# Altium PCB Carte_Traitement_V22.PcbDoc
Units mm, origin at the board's own origin, x right, y up, seen from the top; angles counter-clockwise.
Board outline 119.89 x 119.89 mm, 2 copper layers (Top Layer, Bottom Layer); 53 components, 102 nets, 357 pads, 31 vias.
Unrouted connection lines stored in the file: 97.
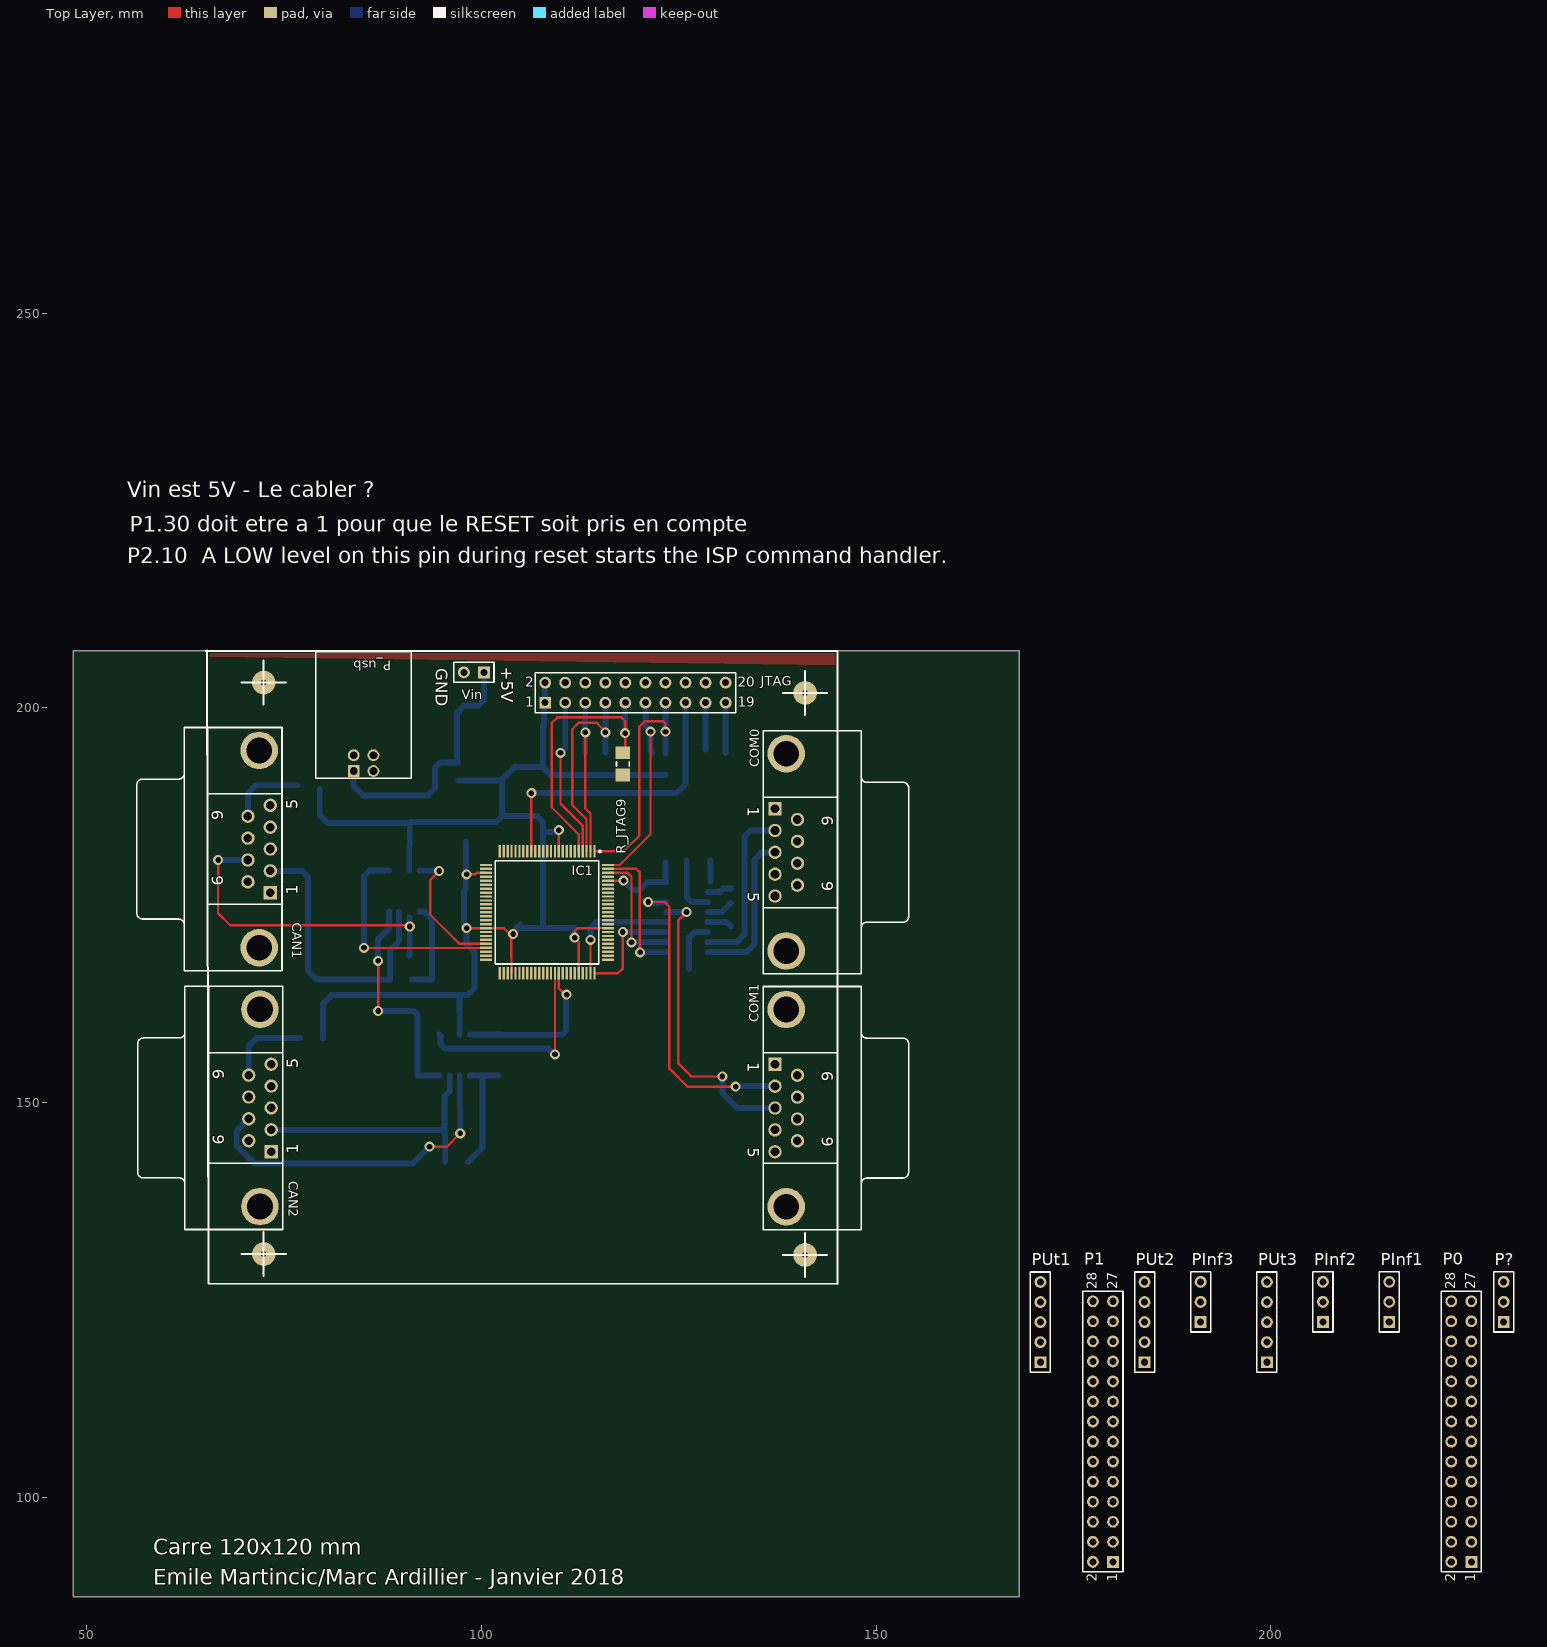
[diagram p0: Top Layer view]
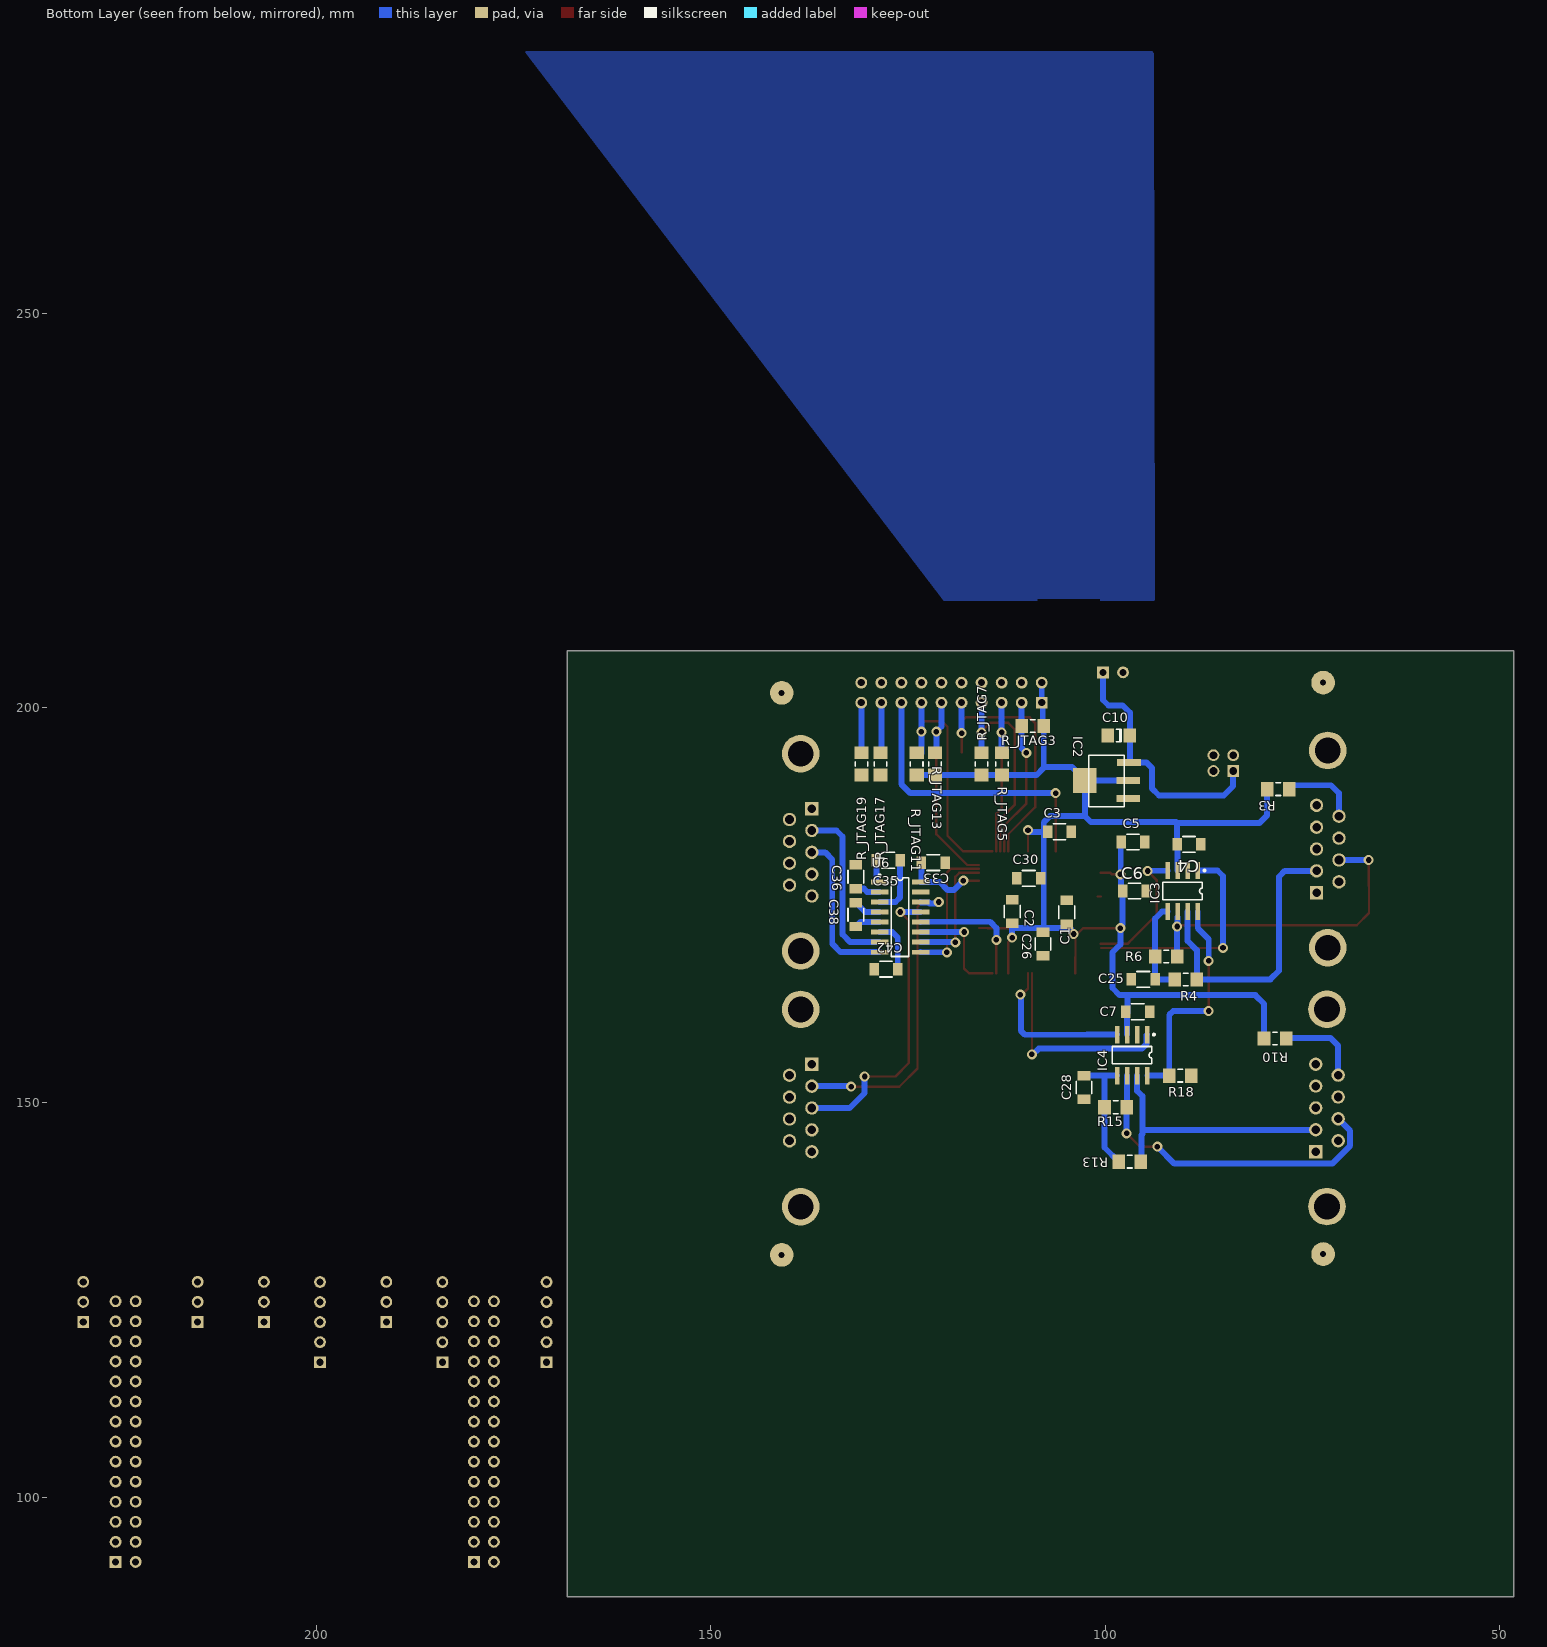
[diagram p1: Bottom Layer view, seen from below]

## Layer stack, top to bottom
Top Solder: solder mask 0.0102, Solder Resist, Dk 3.5
Top Layer: signal copper 0.0356
Dielectric1: dielectric 0.32, FR-4, Dk 4.8
Bottom Layer: signal copper 0.0356
Bottom Solder: solder mask 0.0102, Solder Resist, Dk 3.5

## Board outline
48.26,207.264 168.148,207.264 168.148,87.376 48.26,87.376

## Design rules (kind name [scope] priority, off if disabled: settings)
Clearance [All] p1: gap=0.3 ignorepadtopadclearanceinfootprint=FALSE except(0: Arc-Hole Track-Hole SMDPad-Hole THPad-Hole Via-Hole Fill-Hole Poly-Hole Region-Hole Text-Hole)
FabricationTestPointUsage TestPointUsage [All] p1: valid=0 allowmultiple=FALSE
FabricationTestpoint Testpoint [(IsPad And (OnTopLayer Or OnBottomLayer))] p1: side=3 testpointundercomponent=TRUE minsize=1.016 maxsize=2.54 preferedsize=1.524 minholesize=0 maxholesize=1.016 preferedholesize=0.813 testpointgrid=0.025 allowsidetop=TRUE allowsidebottom=TRUE usegrid=TRUE gridtolerance=0
PlaneClearance [All] p1: clearance=0.6
PlaneConnect [All] p1: planeconnectstyle=Relief reliefexpansion=0.508 reliefentries=4 reliefconductorwidth=0.762 reliefairgap=0.254
PolygonConnect [All] p1: connectstyle=Relief reliefconductorwidth=0.762 reliefentries=4 polygonreliefangle="90 Angle" airgapwidth=0.254
RoomDefinition Carte_Keil_Emile_proc_v0 [InComponentClass('Carte_Keil_Emile_proc_v0')] p1: confinementstyle=ConfineIn formatcopy=TRUE lockcomponents=FALSE outline 169.3,88.9 231.4,88.9 231.4,131.4 169.3,131.4
RoomDefinition Carte_Keil_Emile_can_v0 [InComponentClass('Carte_Keil_Emile_can_v0')] p2: confinementstyle=ConfineIn formatcopy=TRUE lockcomponents=FALSE outline 0,0 50.8,0 50.8,25.4 0,25.4
RoutingVias [All] p1: holewidth=0.8 width=1.3 viastyle="Through Hole" minholewidth=0.711 minwidth=1.27 maxholewidth=1.711 maxwidth=3.27
SolderMaskExpansion [All] p1: expansion=0.102 istentingtop=FALSE
Width [All] p1: maxlimit=2.5 minlimit=0.2 preferedwidth=0.75 toplayer_prefwidth=0.3 minimp=50.000000 maximp=50.000000 favimp=50.000000
26 further rules are at their usual default settings.

## Classes and differential pairs
component class Carte_Keil_Emile_proc_v0: C1 C2 C3 C4 C5 C6 C7 C10 IC1 IC2 JTAG P0 P1 P? P_usb PInf1 PInf2 PInf3 PUt1 PUt2 PUt3 R_JTAG3 R_JTAG5 R_JTAG7 R_JTAG9 R_JTAG11 R_JTAG13 R_JTAG17 R_JTAG19 Vin
component class Carte_Keil_Emile_can_v0: C25 C26 C28 C30 C33 C35 C36 C38 C42 CAN1 CAN2 COM0 COM1 IC3 IC4 R3 R4 R6 R10 R13 R15 R18 U6

## Components (designator, comment, footprint, x,y, rotation, side; value= is the part's Value field where it differs from the comment)
C1 "Capa_1206" Res_1206 104.9,174.1 r270 bottom
C2 "Capa_1206" Res_1206 111.8,174.2 r270 bottom
C3 "Capa_1206" Res_1206 105.8,184.3 r0 bottom
C4 "Capa_1206" Res_1206 89.4,182.7 r0 bottom
C5 "Capa_1206" Res_1206 96.5,183 r0 bottom
C6 "Capa_1206" Res_1206 96.3,176.8 r0 bottom
C7 "Capa_1206" Res_1206 95.9,161.5 r0 bottom
C10 "Capa_1206" CC3216-1206 98.3,196.5 r0 bottom
C25 "1n" Res_1206 95.2,165.6 r0 bottom
C26 "100n" Res_1206 107.9,170.1 r90 bottom
C28 "1n" Res_1206 102.7,151.9 r270 bottom
C30 "100n" Res_1206 109.7,178.4 r180 bottom
C33 "100n" Res_1206 121.8,180.4 r180 bottom
C35 "100n" Res_1206 127.5,180.7 r0 bottom
C36 "100n" Res_1206 131.6,178.6 r90 bottom
C38 "100n" Res_1206 131.6,173.8 r90 bottom
C42 "100n" Res_1206 127.8,166.9 r0 bottom
CAN1 "D Connector 9" DSUB1.385-2H9 62.32,182.115 r90 top
CAN2 "D Connector 9" DSUB1.385-2H9 62.42,149.315 r90 top
COM0 "D Connector 9" DSUB1.385-2H9 148.1,181.7 r270 top
COM1 "D Connector 9" DSUB1.385-2H9 148.1,149.3 r270 top
IC1 "LPC1768FBD" F-QFP14X14-G100/Z17N 108.3,174.1 r270 top
IC2 "LD1117" SOT-223 97.1,188.5 r0 bottom
IC3 "TJA1040" SO-G8 90.2,176.8 r0 bottom
IC4 "TJA1040" SO-G8 96.6,156 r0 bottom
JTAG "Header 10X2" HDR2X10 108.06,200.66 r0 top
P0 "Header 14X2" HDR2X14 225.4,91.8 r90 top
P1 "Header 14X2" HDR2X14 180,91.8 r90 top
P? "Header 3" HDR1X3 229.5,122.2 r90 top
P_usb "USB_Amphenol_61729-0010BLF" USB_B_Amphenol_61729-0010BLF 83.8,192 r180 top
PInf1 "Capt_Inf_G" HDR1X3 215,122.2 r90 top
PInf2 "Capt_Inf_Mid" HDR1X3 206.6,122.2 r90 top
PInf3 "Capt_Inf_Mid" HDR1X3 191.1,122.2 r90 top
PUt1 "Capt_Uts_G" HDR1X5 170.8,117.1 r90 top
PUt2 "Capt_Uts_Mid" HDR1X5 184,117.1 r90 top
PUt3 "Capt_Uts_D" HDR1X5 199.5,117.1 r90 top
R3 "Res" CR3216-1206 78.1,189.7 r0 bottom value=N.P.
R4 "Res" CR3216-1206 89.8,165.6 r0 bottom value=60
R6 "Res" CR3216-1206 92.3,168.5 r180 bottom value=60
R10 "Res" CR3216-1206 78.5,158.1 r0 bottom value=N.P.
R13 "Res" CR3216-1206 96.9,142.5 r0 bottom value=60
R15 "Res" CR3216-1206 98.7,149.4 r180 bottom value=60
R18 "Res" CR3216-1206 90.5,153.4 r180 bottom value=10k
R_JTAG3 "Res" CR3216-1206 109.2,197.7 r0 bottom value=10K
R_JTAG5 "Res" CR3216-1206 113.1,192.9 r90 bottom value=10K
R_JTAG7 "Res" CR3216-1206 115.7,192.9 r90 bottom value=10K
R_JTAG9 "Res" CR3216-1206 117.9,192.9 r90 top value=10K
R_JTAG11 "Res" CR3216-1206 121.6,192.9 r270 bottom value=10K
R_JTAG13 "Res" CR3216-1206 123.9,192.9 r270 bottom value=10K
R_JTAG17 "Res" CR3216-1206 128.5,192.9 r270 bottom value=10K
R_JTAG19 "Res" CR3216-1206 130.9,192.9 r270 bottom value=10K
U6 "MAX232CSE" NSO16 126,173.5 r270 bottom
Vin "Header 2" HDR1X2 100.3,204.5 r180 top

## Footprints (in the part's own frame and the unit in brackets; to place one, negate y for a bottom-side part, rotate by r counter-clockwise, add the part's x,y. Pads: shape width x height; smd on the part's side, far side on the other; paste and mask are expansions set on the pad)
CC3216-1206 [mm] "Chip Capacitor; Body 3.2 x 1.6 mm (LxW typ)"
  rect 1.6x1.8 smd: 1(-1.4,0) 2(1.4,0)
  silkscreen extent -0.3,-0.8 0.3,0.8
CR3216-1206 [mm] "Chip Resistor; Body 3.2 x 1.6 mm (LxW typ)"
  rect 1.6x1.8 smd: 1(-1.4,0) 2(1.4,0)
  silkscreen extent -0.3,-0.8 0.3,0.8
DSUB1.385-2H9 [mm] "Connector; D Subminiature; 9 Position; Right Angle; Pitch 1.385 mm"
  rect 1.69x1.69 hole 1.09: 1(-5.54,-10.92)
  round 1.69 hole 1.09: 2(-2.77,-10.92) 3(0,-10.92) 4(2.77,-10.92) 5(5.54,-10.92) 6(-4.155,-8.08) 7(-1.385,-8.08) 8(1.385,-8.08) 9(4.155,-8.08)
  round 4.76 hole 3.26: 10(-12.495,-9.5) 11(12.495,-9.5)
  silkscreen extent -15.4,-12.4 15.4,6
F-QFP14X14-G100/Z17N [mm]
  rect 1.55x0.3 smd: 1(-7.725,6) 2(-7.725,5.5) 3(-7.725,5) 4(-7.725,4.5) 5(-7.725,4) 6(-7.725,3.5) 7(-7.725,3) 8(-7.725,2.5) 9(-7.725,2) 10(-7.725,1.5) 11(-7.725,1) 12(-7.725,0.5) 13(-7.725,0) 14(-7.725,-0.5) 15(-7.725,-1) 16(-7.725,-1.5) 17(-7.725,-2) 18(-7.725,-2.5) 19(-7.725,-3) 20(-7.725,-3.5) 21(-7.725,-4) 22(-7.725,-4.5) 23(-7.725,-5) 24(-7.725,-5.5) 25(-7.725,-6) 51(7.725,-6) 52(7.725,-5.5) 53(7.725,-5) 54(7.725,-4.5) 55(7.725,-4) 56(7.725,-3.5) 57(7.725,-3) 58(7.725,-2.5) 59(7.725,-2) 60(7.725,-1.5) 61(7.725,-1) 62(7.725,-0.5) 63(7.725,0) 64(7.725,0.5) 65(7.725,1) 66(7.725,1.5) 67(7.725,2) 68(7.725,2.5) 69(7.725,3) 70(7.725,3.5) 71(7.725,4) 72(7.725,4.5) 73(7.725,5) 74(7.725,5.5) 75(7.725,6)
  rect 0.3x1.55 smd: 26(-6,-7.725) 27(-5.5,-7.725) 28(-5,-7.725) 29(-4.5,-7.725) 30(-4,-7.725) 31(-3.5,-7.725) 32(-3,-7.725) 33(-2.5,-7.725) 34(-2,-7.725) 35(-1.5,-7.725) 36(-1,-7.725) 37(-0.5,-7.725) 38(0,-7.725) 39(0.5,-7.725) 40(1,-7.725) 41(1.5,-7.725) 42(2,-7.725) 43(2.5,-7.725) 44(3,-7.725) 45(3.5,-7.725) 46(4,-7.725) 47(4.5,-7.725) 48(5,-7.725) 49(5.5,-7.725) 50(6,-7.725) 76(6,7.725) 77(5.5,7.725) 78(5,7.725) 79(4.5,7.725) 80(4,7.725) 81(3.5,7.725) 82(3,7.725) 83(2.5,7.725) 84(2,7.725) 85(1.5,7.725) 86(1,7.725) 87(0.5,7.725) 88(0,7.725) 89(-0.5,7.725) 90(-1,7.725) 91(-1.5,7.725) 92(-2,7.725) 93(-2.5,7.725) 94(-3,7.725) 95(-3.5,7.725) 96(-4,7.725) 97(-4.5,7.725) 98(-5,7.725) 99(-5.5,7.725) 100(-6,7.725)
  silkscreen extent -7.85,-6.55 6.55,6.83
HDR1X2 [mm] "Connector; Header; 2 Position"
  rect 1.5x1.5 hole 0.9: 1(0,0)
  round 1.5 hole 0.9: 2(2.54,0)
  silkscreen extent -1.27,-1.27 3.81,1.27
HDR1X3 [mm] "Connector; Header; 3 Position"
  rect 1.5x1.5 hole 0.9: 1(0,0)
  round 1.5 hole 0.9: 2(2.54,0) 3(5.08,0)
  silkscreen extent -1.27,-1.27 6.35,1.27
HDR1X5 [mm] "Connector; Header; 5 Position"
  rect 1.5x1.5 hole 0.9: 1(0,0)
  round 1.5 hole 0.9: 2(2.54,0) 3(5.08,0) 4(7.62,0) 5(10.16,0)
  silkscreen extent -1.27,-1.27 11.43,1.27
HDR2X10 [mm] "Connector; Header; 10x2 Position"
  rect 1.5x1.5 hole 0.9: 1(0,0)
  round 1.5 hole 0.9: 2(0,2.54) 3(2.54,0) 4(2.54,2.54) 5(5.08,0) 6(5.08,2.54) 7(7.62,0) 8(7.62,2.54) 9(10.16,0) 10(10.16,2.54) 11(12.7,0) 12(12.7,2.54) 13(15.24,0) 14(15.24,2.54) 15(17.78,0) 16(17.78,2.54) 17(20.32,0) 18(20.32,2.54) 19(22.86,0) 20(22.86,2.54)
  silkscreen extent -1.27,-1.27 24.13,3.81
HDR2X14 [mm] "Connector; Header; 14x2 Position"
  rect 1.5x1.5 hole 0.9: 1(0,0)
  round 1.5 hole 0.9: 2(0,2.54) 3(2.54,0) 4(2.54,2.54) 5(5.08,0) 6(5.08,2.54) 7(7.62,0) 8(7.62,2.54) 9(10.16,0) 10(10.16,2.54) 11(12.7,0) 12(12.7,2.54) 13(15.24,0) 14(15.24,2.54) 15(17.78,0) 16(17.78,2.54) 17(20.32,0) 18(20.32,2.54) 19(22.86,0) 20(22.86,2.54) 21(25.4,0) 22(25.4,2.54) 23(27.94,0) 24(27.94,2.54) 25(30.48,0) 26(30.48,2.54) 27(33.02,0) 28(33.02,2.54)
  silkscreen extent -1.27,-1.27 34.29,3.81
NSO16 [mm] "Small Outline; 16 Leads; Body Width 3.9 mm; Pitch 1.27 mm"
  rect 0.6x2.2 smd: 1(-4.445,-2.6) 2(-3.175,-2.6) 3(-1.905,-2.6) 4(-0.635,-2.6) 5(0.635,-2.6) 6(1.905,-2.6) 7(3.175,-2.6) 8(4.445,-2.6) 9(4.445,2.6) 10(3.175,2.6) 11(1.905,2.6) 12(0.635,2.6) 13(-0.635,2.6) 14(-1.905,2.6) 15(-3.175,2.6) 16(-4.445,2.6)
  silkscreen extent -5.42,-2.72 5,1.1
Res_1206 [mm] "Res 1206 (3.2x1.6mm)"
  rect 1.2x1.6 smd: 1(-1.5,0) 2(1.5,0)
  silkscreen extent -0.8,-1 0.8,1
SO-G8 [mm] "Small Outline; 8 Leads; Body Width 3.9 mm; Pitch 1.27 mm"
  rect 0.6x2.2 smd: 1(-1.905,-2.6) 2(-0.635,-2.6) 3(0.635,-2.6) 4(1.905,-2.6) 5(1.905,2.6) 6(0.635,2.6) 7(-0.635,2.6) 8(-1.905,2.6)
  silkscreen extent -2.88,-2.72 2.5,1.1
SOT-223 [mm]
  rect 3x0.9 smd: 1(0,0) 2(0,-2.3) 3(-0.1,-4.6)
  rect 3x3.2 smd: 2(5.5,-2.3)
  silkscreen extent 0.5,-5.5 5,1
USB_B_Amphenol_61729-0010BLF [mm]
  rect 1.5x1.5 hole 1: 1(0,0)
  round 1.5 hole 1: 2(-2.5,0) 3(-2.5,-2) 4(0,-2)
  silkscreen extent -7.3,-15.1 4.8,0.9

## Part data
C25 C26 C28 C30 C33 C35 C36 C38 C42: library part Capa_1206
CAN1 CAN2 COM0 COM1: "Receptacle Assembly, 9 Position, Right Angle", PackageDocument=O, DatasheetDocument=1-Sep-1999, Gender=Receptacle, LatestRevisionDate=17-Jul-2002, LatestRevisionNote="Re-released for DXP Platform.", Orientation="Right Angle", PackageReference=788750, Positions=9, Published=15-Jun-2001, Publisher="Altium Limited"
IC1: "NXP Cortex M3 LPC1768"
IC2: "PAD a Vout"
IC3 IC4: "CAN bus transceiver"
JTAG: "Header, 10-Pin, Dual row", LatestRevisionDate=17-Jul-2002, LatestRevisionNote="Re-released for DXP Platform.", Publisher="Altium Limited"
P0 P1: "Header, 14-Pin, Dual row", LatestRevisionDate=17-Jul-2002, LatestRevisionNote="Re-released for DXP Platform.", Publisher="Altium Limited"
P?: "Header, 3-Pin", LatestRevisionDate=17-Jul-2002, LatestRevisionNote="Re-released for DXP Platform.", Publisher="Altium Limited"
P_usb: "61729-0010BLF Farnell 1097897"
PInf1 PInf2 PInf3: library part "Header 3", "Header, 3-Pin", LatestRevisionDate=17-Jul-2002, LatestRevisionNote="Re-released for DXP Platform.", Publisher="Altium Limited"
PUt1 PUt2 PUt3: library part "Header 5", "Header, 5-Pin", LatestRevisionDate=17-Jul-2002, LatestRevisionNote="Re-released for DXP Platform.", Publisher="Altium Limited"
R3 R4 R6 R10 R13 R15 R18 R_JTAG3 R_JTAG5 R_JTAG7 R_JTAG9 R_JTAG11 R_JTAG13 R_JTAG17 R_JTAG19: "Resistance", Published=8-Jun-2000, Publisher="Altium Limited", Revision="July-2002: Re-released for DXP Platform."
U6: "+5V Powered, Multi-Channel RS-232 Driver/Receiver", Code_IPC=SO16, Code_JEDEC=MS-012-AC, ComponentLink1Description="Manufacturer Link", ComponentLink1URL=http://www.maxim-ic.com/, ComponentLink2Description=Datasheet, ComponentLink2URL=http://pdfserv.maxim-ic.com/en/ds/MAX220-MAX249.pdf, LatestRevisionDate=6-Jun-2005, LatestRevisionNote="Stylized 3D Model Added.", PackageReference=NSO16, Published=16-Jan-2001, Publisher="Altium Limited"
Vin: "Header, 2-Pin", LatestRevisionDate=17-Jul-2002, LatestRevisionNote="Re-released for DXP Platform.", Publisher="Altium Limited"

## Free pads (board coordinates)
  round 3 hole 0.762: 1(72.4,130.8) 1(72.4,203.2) 1(141,130.7) 1(141,201.9)

## Via types
v1: diameter 1.27, hole 0.711, Top Layer to Bottom Layer, 31 vias

## Nets (pads, with @x,y where several pads share a name; then routed paths per layer and width w, separated by ;. In a path a pad name is that pad's centre, name@x,y a point inside that pad or via, vN(x,y) a via of type N, cw(c..) or ccw(c..) an arc to the next point about the centre after c; other vN are vias at no path point)
+3.3V: C1.2 C2.2 C3.2 C4.2 C5.2 C6.2 C7.2 C26.2 C30.2 C33.1 IC1.10 IC1.28 IC1.42 IC1.54 IC1.71 IC1.84 IC1.96 IC2.2 IC3.3 IC4.3 JTAG.1 JTAG.2 PInf1.1 PInf2.1 PInf3.1 R3.2 R10.2 R_JTAG3.1 R_JTAG5.1 R_JTAG7.1 R_JTAG11.2 R_JTAG13.2 U6.16 | length 192.5
  Top Layer w0.25: 114.91,172.1 IC1.84
  Top Layer w0.3: v1(98.1,172.1) IC1.42 102.8,172.1 v1@103.7,171.2 ; v1(98.1,178.9) 99.15,178.9 99.35,179.1 IC1.28 ; IC1.54 103.8,168.398 103.781,168.417 103.781,170.859 103.824,170.902 103.824,171.076 v1@103.7,171.2 ; v1(104.01,171.35) 103.85,171.35 v1@103.7,171.2 ; IC1.10 109.8,183.05 v1(109.8,184.5) ; IC1.71 112.3,170.3 112.07,170.575 v1(111.8,170.9) 111.8,171.7 112.2,172.1 114.91,172.1 ; IC1.96 v1(118,178.1)
  Bottom Layer w0.75: R3.2 79.5,186.4 80.5,185.4 90.9,185.4 ; R10.2 79.9,162.5 81,163.6 97.2,163.6 ; IC3.3 C4.2@90.835,182.635 ; C4.2 90.9,185.4 ; IC2.2@97.1,190.8 IC2.2@102.6,190.8 ; IC4.3 97.235,161.335 97.2,161.37 97.2,163.6 ; C5.2 98.05,182.95 98.05,178.95 v1(98.1,178.9) 98.001,178.801 98.001,177 C6.2 97.8,172.541 98.1,172.241 v1(98.1,172.1) 98.1,170.03 99.1,169.03 99.1,164.5 98.2,163.6 97.2,163.6 ; v1(104.01,171.35) 104.01,171.491 104.4,171.881 C1.2@104.4,172.1 ; C1.2 C1.2@104.4,172.1 ; 107.7,192.5 104.2,192.5 102.7,191.1 IC2.2@102.6,190.8 ; R_JTAG3.1 107.8,192.4 108.7,191.5 R_JTAG5.1 R_JTAG7.1 R_JTAG11.2 R_JTAG13.2@123.3,191.5 ; R_JTAG3.1@107.93,197.83 107.93,200.53 JTAG.1 JTAG.2 ; v1(109.8,184.5) 109.6,184.3 C3.2@107.8,184.3 ; v1(111.8,170.9) 111.8,172.1 C26.2@107.8,172.1 ; v1(118,178.1) 119.2,176.9 119.97,176.9 121.015,177.945 U6.16 ; U6.16@123.3,178.045 C33.1 ; 90.9,185.4 91.025,185.525 101.825,185.525 102.6,186.3 ; 102.6,186.3 IC2.2@102.6,190.8 ; 102.6,186.3 107,186.3 107.8,185.5 C3.2@107.8,184.3 ; C1.2@104.4,172.1 C26.2@107.8,172.1 ; C26.2@107.8,172.1 107.8,178.4 C3.2@107.8,184.3
+5V: PUt1.5 PUt2.5 PUt3.5
GND: C1.1 C2.1 C3.1 C4.1 C5.1 C6.1 C7.1 C10.2 C25.2 C26.1 C28.2 C30.1 C33.2 C36.2 C42.2 CAN1.3 CAN1.5 CAN1.6 CAN2.3 CAN2.5 CAN2.6 COM0.5 COM1.5 IC1.11 IC1.31 IC1.41 IC1.55 IC1.72 IC1.83 IC1.97 IC2.1 IC3.2 IC4.2 JTAG.4 JTAG.6 JTAG.8 JTAG.10 JTAG.12 JTAG.14 JTAG.16 JTAG.18 JTAG.20 P_usb.4 PInf1.3 PInf2.3 PInf3.3 PUt1.1 PUt2.1 PUt3.1 R18.2 R_JTAG9.1 R_JTAG17.2 R_JTAG19.2 U6.15 Vin.2
NetC10_1: C10.1 IC2.3 P_usb.1 | length 32.8
  Bottom Layer w0.75: P_usb.1 83.8,190.1 85,188.9 93.2,188.9 94.1,189.8 94.1,192.4 94.8,193.1 IC2.3 96.9,193.2 96.9,199.4 97.8,200.3 99.6,200.3 100.3,201 100.3,204.5
NetC25_1: C25.1 IC3.5 R4.2 R6.1 | length 12.2
  Bottom Layer w0.75: R4.2 C25.1 93.7,173.3 92.8,174.2 IC3.5
NetC28_1: C28.1 IC4.5 R13.2 R15.1 | length 15.2
  Bottom Layer w0.75: R13.2 100.1,144.3 100.1,153.4 ; IC4.5 C28.1@102.1,153.4
NetC35_1: C35.1 U6.3 | length 7.5
  Bottom Layer w0.75: C35.1 126,176 126.595,175.405 U6.3
NetC35_2: C35.2 U6.1 | length 2.7
  Bottom Layer w0.75: U6.1@129,178 C35.2
NetC36_1: C36.1 U6.2 | length 3.2
  Bottom Layer w0.75: U6.2 130.175,176.675 130.6,177.1 C36.1
NetC38_1: C38.1 U6.5 | length 3.2
  Bottom Layer w0.75: U6.5 131.035,172.865 C38.1
NetC38_2: C38.2 U6.4 | length 3.5
  Bottom Layer w0.75: U6.4 130.435,174.135 C38.2
NetC42_1: C42.1 U6.6 | length 6.6
  Bottom Layer w0.75: C42.1 126.3,170.9 126.995,171.595 U6.6
NetCAN1_2: CAN1.2 IC3.7 R4.1 | length 36.9
  Bottom Layer w0.75: CAN1.2 77.255,179.345 78,178.6 78,166.7 79.1,165.6 R4.1 88.4,169.3 89.565,170.465 IC3.7
NetCAN1_7: CAN1.7 IC3.6 R6.2 | length 40.4
  Top Layer w0.3: v1(66.63,180.73) 66.6,174 68.15,172.45 90.75,172.45 v1(90.9,172.3)
  Bottom Layer w0.75: v1(66.63,180.73) CAN1.7 ; R6.2@90.8,168.6 90.9,168.7 v1(90.9,172.3) 90.868,172.332 IC3.6@90.868,173.475
NetCAN1_9: CAN1.9 R3.1 | length 9.6
  Bottom Layer w0.75: CAN1.9 70.4,189.2 71.4,190.2 R3.1@76.7,190.2
NetCAN2_2: CAN2.2 IC4.7 R13.1 | length 33.1
  Bottom Layer w0.75: CAN2.2 95.245,146.545 ; R13.1@95.4,142.5 95.4,145.9 95.3,146 95.3,150.8 95.965,151.465 IC4.7
NetCAN2_7: CAN2.7 IC4.6 R15.2 | length 42.1
  Top Layer w0.3: v1(93.4,144.4) 95.6,144.4 v1(97.3,146.1)
  Bottom Layer w0.75: CAN2.7 68.98,146.41 68.98,144.53 71.255,142.255 91.255,142.255 v1(93.4,144.4) ; R15.2@97.235,149.465 IC4.6 ; v1(97.3,146.1) R15.2
NetCAN2_9: CAN2.9 R10.1 | length 10.6
  Bottom Layer w0.75: CAN2.9 70.5,157.2 71.5,158.2 R10.1@77,158.2
NetCOM0_2: COM0.2 U6.7 | length 21.7
  Bottom Layer w0.75: U6.7 132.325,170.325 133.3,171.3 133.3,183.7 134.07,184.47 COM0.2
NetCOM0_3: COM0.3 U6.8 | length 20.1
  Bottom Layer w0.75: U6.8 133.555,169.055 134.6,170.1 134.6,180.8 135.5,181.7 COM0.3
NetCOM1_2: COM1.2 U6.14 | length 40.1
  Top Layer w0.3: v1(121.105,175.405) 123.195,175.405 123.8,174.8 123.8,154.3 126.1,152 v1(132.2,152)
  Bottom Layer w0.75: v1(121.105,175.405) 121.246,175.405 121.411,175.24 122.259,175.24 122.349,175.33 123.325,175.33 U6.14 ; v1@132.27,152.07 COM1.2
NetCOM1_3: COM1.3 U6.13 | length 38
  Top Layer w0.3: v1(125.965,174.135) 124.9,173.07 124.9,155 126.6,153.3 v1(130.5,153.3)
  Bottom Layer w0.75: U6.13 v1(125.965,174.135) ; v1(130.5,153.3) 130.5,151.2 132.4,149.3 COM1.3
NetIC1_1: IC1.1 JTAG.13 R_JTAG13.1 | length 31.5
  Top Layer w0.3: IC1.1 118.025,181.825 120,183.8 120,197.6 120.7,198.3 123,198.3 123.3,198 v1(123.3,197)
  Bottom Layer w0.75: R_JTAG13.1@123.3,194.2 JTAG.13
NetIC1_2: IC1.2 JTAG.5 R_JTAG5.2 | length 21.7
  Top Layer w0.3: v1(113.14,196.9) 113.14,187.26 113.8,186.6 IC1.2
  Bottom Layer w0.75: R_JTAG5.2@113.14,194.34 JTAG.5
NetIC1_3: IC1.3 JTAG.7 R_JTAG7.2 | length 27.6
  Top Layer w0.3: IC1.3 113.3,185.9 111.5,187.7 111.5,197.3 112.3,198.1 114.6,198.1 115.68,197.02 v1(115.68,196.9)
  Bottom Layer w0.75: R_JTAG7.2@115.68,194.32 JTAG.7
NetIC1_4: IC1.4 JTAG.3 R_JTAG3.2 | length 20.2
  Top Layer w0.3: v1(110,194.3) 110,187.9 112.8,185.1 112.8,182.85 IC1.4
  Bottom Layer w0.75: v1(110,194.3) 110.6,194.9 R_JTAG3.2 JTAG.3
NetIC1_5: IC1.5 JTAG.9 R_JTAG9.2 | length 35.4
  Top Layer w0.3: IC1.5 112.3,184 108.9,187.4 108.9,198.1 109.6,198.8 117.7,198.8 118.2,198.3 v1(118.2,196.8)
  Top Layer w0.35: R_JTAG9.2@118.2,194.4 v1(118.2,196.8)
  Bottom Layer w0.75: v1(118.2,196.8) 118.2,200.48 118.3,200.58 JTAG.9@118.3,200.4
NetIC1_100: IC1.100 JTAG.11 R_JTAG11.1 | length 26.7
  Top Layer w0.3: IC1.100 117.5,180.1 121.4,184 v1(121.4,197)
  Bottom Layer w0.75: JTAG.11 120.76,197.64 v1(121.4,197) 121.4,194.5 R_JTAG11.1
NetIC3_8: IC3.8 IC4.8 R18.1 | length 28.9
  Top Layer w0.3: v1(86.9,161.6) v1(86.9,167.94)
  Bottom Layer w0.75: v1(86.9,161.6) 91.4,161.6 91.9,161.1 R18.1 IC4.8 ; v1(86.9,167.94) 86.9,170.7 88.295,172.095 IC3.8
NetJTAG_17: JTAG.17 R_JTAG17.1 | length 5.9
  Bottom Layer w0.75: R_JTAG17.1@128.38,194.72 JTAG.17
NetJTAG_19: JTAG.19 R_JTAG19.1 | length 6.4
  Bottom Layer w0.75: R_JTAG19.1 JTAG.19
P0.0: IC1.46 IC3.4 P0.13 | length 17.2
  Top Layer w0.3: v1(94.633,179.333) 93.5,178.2 93.5,173.8 96.6,170.7 97.2,170.1 IC1.46
  Bottom Layer w0.75: IC3.4 92.139,179.366 94.599,179.366 v1(94.633,179.333)
P0.1: IC1.47 IC3.1 P0.14 | length 28.1
  Top Layer w0.25: v1(85.1,169.6) IC1.47
  Bottom Layer w0.75: v1(85.1,169.6) 85.1,178.7 85.8,179.4 IC3.1
P0.2: IC1.98 P0.15 PInf1.2 U6.10 | length 15.7
  Top Layer w0.3: IC1.98 118.5,179.1 119,178.6 v1(119,170.3)
  Bottom Layer w0.75: v1@119.225,170.325 U6.10
P0.3: IC1.99 P0.16 U6.9 | length 17.8
  Top Layer w0.3: IC1.99 119.6,179.6 120.055,179.145 120.055,169.045 v1(120.085,169.015)
  Bottom Layer w0.75: v1@120.085,168.941 v1(120.085,169.015) 120.105,169.035 123.38,169.035 U6.9
P0.4: IC1.81 P1.5
P0.5: IC1.80 P1.6
P0.6: IC1.79 P1.3
P0.7: IC1.78 P1.4
P0.8: IC1.77 P1.1
P0.9: IC1.76 P1.2
P0.10: IC1.48 P0.1
P0.11: IC1.49 P0.2
P0.15: IC1.62 P0.3
P0.16: IC1.63 P0.4
P0.17: IC1.61 P0.5
P0.18: IC1.60 P0.6
P0.19: IC1.59 P0.7
P0.20: IC1.58 P0.8
P0.21: IC1.57 P0.9
P0.22: IC1.56 P0.10
P0.23: IC1.9 P0.19 PInf2.2
P0.24: IC1.8 P0.20 PInf3.2
P0.25: IC1.7 P0.21
P0.26: IC1.6 P0.22
P0.27: IC1.25 P0.25
P0.28: IC1.24 P0.26
P0.29: IC1.29 P0.27
P0.30: IC1.30 P0.28
P1.0: IC1.95
P1.1: IC1.94
P1.4: IC1.93
P1.8: IC1.92
P1.9: IC1.91
P1.10: IC1.90
P1.11: IC1.89
P1.15: IC1.88
P1.16: IC1.87
P1.17: IC1.86
P1.18: IC1.32
P1.19: IC1.33
P1.20: IC1.34 | length 0.4
  Top Layer w0.3: IC1.34 IC1.34@101,176.1
P1.21: IC1.35
P1.22: IC1.36
P1.23: IC1.37
P1.24: IC1.38
P1.25: IC1.39
P1.26: IC1.40
P1.27: IC1.43
P1.28: IC1.44
P1.29: IC1.45
P1.30: IC1.21
P1.31: IC1.20
P2.0: IC1.75 U6.11 | length 14
  Top Layer w0.3: IC1.75 117.275,166.375 117.9,167 v1(117.9,171.6)
  Bottom Layer w0.75: v1(117.9,171.6) 117.905,171.595 U6.11
P2.1: IC1.74 U6.12 | length 15.7
  Top Layer w0.3: IC1.74 v1(113.8,170.6)
  Bottom Layer w0.75: v1(113.8,170.6) 113.8,172.1 114.6,172.9 114.8,172.9 U6.12
P2.2: IC1.73 PUt3.4
P2.3: IC1.70 PUt3.3
P2.4: IC1.69 PUt2.4
P2.5: IC1.68 PUt2.3
P2.6: IC1.67
P2.7: IC1.66 IC4.4 | length 20.2
  Top Layer w0.3: IC1.66 109.8,164.447 110.573,163.674 v1(110.774,163.674)
  Bottom Layer w0.75: IC4.4 102.306,158.6 102.316,158.59 110.19,158.59 110.701,159.101 110.701,163.6 v1(110.774,163.674)
P2.8: IC1.65 IC4.1 | length 26.6
  Top Layer w0.3: v1(109.3,156.1) 109.3,162.6 IC1.65
  Bottom Layer w0.75: IC4.1 94.77,158.525 94.77,157.44 95.385,156.825 108.434,156.825 109.159,156.1 v1(109.3,156.1)
P2.9: IC1.64
P2.10: IC1.53
P2.11: IC1.52 PUt1.4
P2.12: IC1.51 PUt1.3
P2.13: IC1.50
P3.25: IC1.27
P3.26: IC1.26
P4.28: IC1.82
P4.29: IC1.85
RESET: IC1.17 JTAG.15 | length 37.7
  Top Layer w0.3: IC1.17 v1(106.3,189.2)
  Bottom Layer w0.75: v1(106.3,189.2) 124.7,189.2 125.84,190.34 JTAG.15
pads on no net: CAN1.1 CAN1.4 CAN1.8 CAN1.10 CAN1.11 CAN2.1 CAN2.4 CAN2.8 CAN2.10 CAN2.11 COM0.1 COM0.4 COM0.6 COM0.7 COM0.8 COM0.9 COM0.10 COM0.11 COM1.1 COM1.4 COM1.6 COM1.7 COM1.8 COM1.9 COM1.10 COM1.11 IC1.12 IC1.13 IC1.14 IC1.15 IC1.16 IC1.18 IC1.19 IC1.22 IC1.23 P0.11 P0.12 P0.17 P0.18 P0.23 P0.24 P1.7 P1.8 P1.9 P1.10 P1.11 P1.12 P1.13 P1.14 P1.15 P1.16 P1.17 P1.18 P1.19 P1.20 P1.21 P1.22 P1.23 P1.24 P1.25 P1.26 P1.27 P1.28 P?.1 P?.2 P?.3 P_usb.2 P_usb.3 PUt1.2 PUt2.2 PUt3.2 Vin.1

## Polygon pours and split planes (outlines as drawn)
GND on Bottom Layer "Bottom Layer-GND" (solid, pour order 1): 93.885,282.947 94.078,283.2 173.569,283.2 120.5,213.6 93.731,213.6
GND on Top Layer "Top Layer-GND" (solid, pour order 0): 65.4,206.5 65.665,206.9 144.806,206.9 144.939,163.3 144.939,205.4 65.266,206.5

## Silkscreen, mask and mechanical layers (free items; w line width, h text height)
Top Overlay:
  lines w0.254: 65.1,207.2 145.1,207.2 145.1,127 65.4,127.1 65.2,207.3 ; 69.606,130.8 75.194,130.8 ; 69.606,203.2 75.194,203.2 ; 72.4,128.006 72.4,133.594 ; 72.4,200.406 72.4,205.994 ; 138.206,130.7 143.794,130.7 ; 138.206,201.9 143.794,201.9 ; 141,127.906 141,133.494 ; 141,199.106 141,204.694
  text "Vin est 5V - Le cabler ?" at 55.1,226.7 h2
  text "P1.30 doit etre a 1 pour que le RESET soit pris en compte" at 55.4,222.3 h2
  text "P2.10  A LOW level on this pin during reset starts the ISP command handler." at 55.1,218.3 h2
  text "+5V" at 102.5,205.2 h1.52 r270
  text "GND" at 94.2,205 h1.52 r270
  text "Carre 120x120 mm" at 58.42,92.71 h2
  text "Emile Martincic/Marc Ardillier - Janvier 2018" at 58.42,88.9 h2
Mechanical 1:
  lines w0.254: 65.2,207.2 65.4,127 127,127 145.1,127 145,207.2 65.2,207.2

## Dimensions
65.2,207.3 to 144.9,210 on Bottom Layer

## Text inside footprints (layer, text, board x,y; h text height)
CAN1: Top Overlay "6" at 67.295,177.46 h1.5 r90; Top Overlay "9" at 67.295,185.77 h1.5 r90; Top Overlay "5" at 76.695,187.155 h1.5 r90; Top Overlay "1" at 76.695,176.325 h1.5 r90
CAN2: Top Overlay "1" at 76.795,143.525 h1.5 r90; Top Overlay "6" at 67.395,144.66 h1.5 r90; Top Overlay "9" at 67.395,152.97 h1.5 r90; Top Overlay "5" at 76.795,154.355 h1.5 r90
COM0: Top Overlay "1" at 133.725,187.49 h1.5 r270; Top Overlay "5" at 133.725,176.66 h1.5 r270; Top Overlay "9" at 143.125,178.045 h1.5 r270; Top Overlay "6" at 143.125,186.355 h1.5 r270
COM1: Top Overlay "1" at 133.725,155.09 h1.5 r270; Top Overlay "5" at 133.725,144.26 h1.5 r270; Top Overlay "9" at 143.125,145.645 h1.5 r270; Top Overlay "6" at 143.125,153.955 h1.5 r270
JTAG: Top Overlay "20" at 132.444,202.692 h1.27; Top Overlay "19" at 132.444,200.152 h1.27; Top Overlay "1" at 105.52,200.152 h1.27; Top Overlay "2" at 105.52,202.692 h1.27
P0: Top Overlay "2" at 223.368,89.26 h1.27 r90; Top Overlay "1" at 225.908,89.26 h1.27 r90; Top Overlay "27" at 225.908,126.344 h1.27 r90; Top Overlay "28" at 223.368,126.344 h1.27 r90
P1: Top Overlay "2" at 177.968,89.26 h1.27 r90; Top Overlay "1" at 180.508,89.26 h1.27 r90; Top Overlay "27" at 180.508,126.344 h1.27 r90; Top Overlay "28" at 177.968,126.344 h1.27 r90